# Altium PCB Leningrad_modify.PcbDoc (part 2 of 4)
Units mil, origin at the board's own origin, x right, y up, seen from the top; angles counter-clockwise.
Board outline 10000 x 7310 mil, 2 copper layers (Top Layer, Bottom Layer); 250 components, 267 nets, 1381 pads, 472 vias.
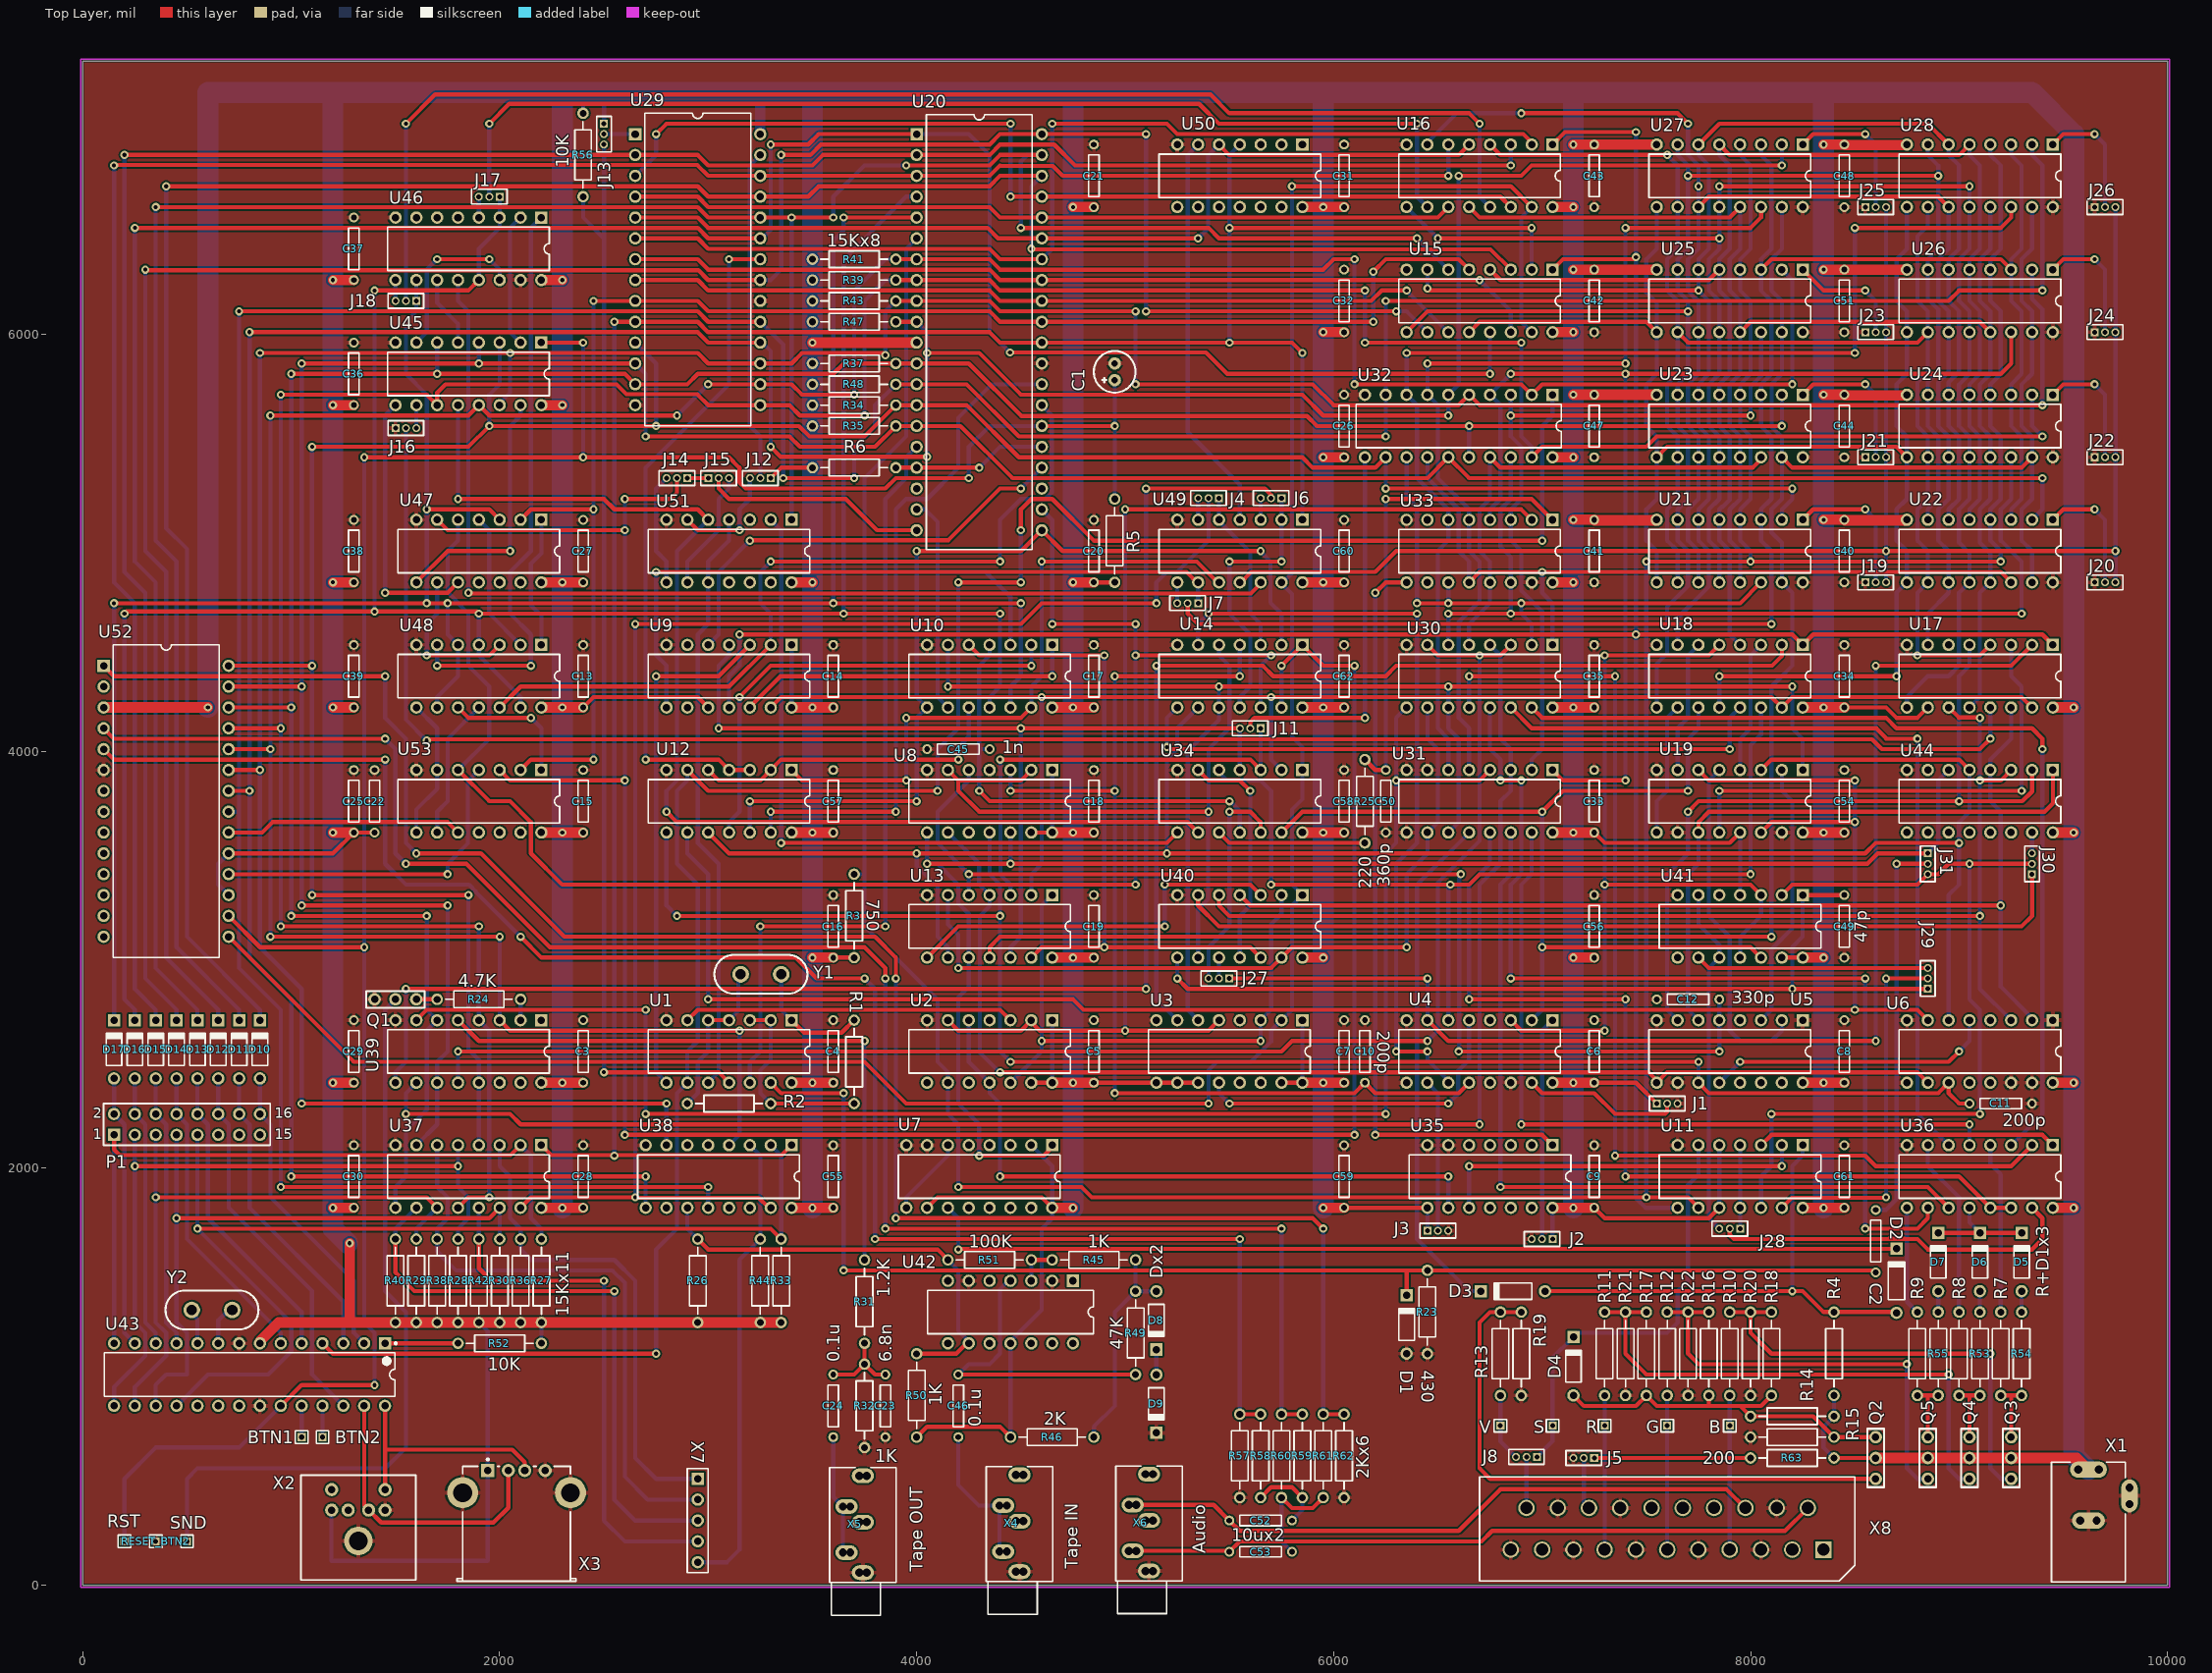
[diagram p0: Top Layer view]

## Via types
v1: diameter 39.37, hole 19.68, Top Layer to Bottom Layer, tented both sides, 472 vias

## Nets (pads, with @x,y where several pads share a name; then routed paths per layer and width w, separated by ;. In a path a pad name is that pad's centre, name@x,y a point inside that pad or via, vN(x,y) a via of type N, cw(c..) or ccw(c..) an arc to the next point about the centre after c; other vN are vias at no path point) (continued)
A10: (continued)
  Bottom Layer w20: v1(300,6310) 300,4960 400,4860 400,3010 650,2760 D12.2@650,2709.76 ; U29.21@3250,6260 3300,6260 3350,6310 v1(3350,6860) ; v1(5100,6110) v1(5100,6960) ; v1(6300,6110) 6350,6110 U15.10@6450,6010
A11: D13.2 U15.13 U20.1 U29.23 | length 12066.8
  Top Layer w20: v1(250,6510) 2950,6510 3000,6460 U29.23@3250,6460 ; v1(3300,6910) 3480,6910 3530,6960 U20.1@4000,6960 ; v1(4447.53,5912.47) 5387.53,5912.47 5490,5810 v1(6750,5810)
  Bottom Layer w20: v1(250,6510) 250,4910 350,4810 350,2960 550,2760 D13.2@550,2709.76 ; U29.23@3250,6460 3260,6460 3300,6500 v1(3300,6910) ; U20.1@4000,6960 4250,6960 4350,6860 4350,6010 v1(4447.53,5912.47) ; v1(6750,5810) U15.13@6750,6010
A12: D14.2 U16.3 U20.2 U29.2 | length 11107.3
  Top Layer w20: v1(200,6860) U29.2@2650,6860 2950,6860 3000,6810 3500,6810 3550,6860 U20.2@4000,6860 4350,6860 4400,6910 4660,6910 4760,6810 v1(6850,6810)
  Bottom Layer w20: v1(200,6860) 200,4860 300,4760 300,2910 450,2760 D14.2@450,2709.76 ; v1(6850,6810) U16.3@6850,6910
A13: D15.2 U16.6 U20.3 U29.26 | length 10797.3
  Top Layer w20: v1(150,6810) 152.47,6812.47 2947.53,6812.47 3000,6760 U29.26@3250,6760 U20.3@4000,6760 4350,6760 4400,6810 4402.47,6807.53 4652.47,6807.53 4700,6760 v1(6550,6760)
  Bottom Layer w20: v1(150,6810) 150,4810 250,4710 250,2860 350,2760 D15.2@350,2709.76 ; v1(6550,6760) U16.6@6550,6910
A14: D16.2 J17.1 U10.11 U20.4 U46.3 U46.13 U48.4 U48.13 | length 11859.2
  Top Layer w20: v1(200,4660) 210,4670 v1(1400,4670) 1890,4670 v1(1900,4660) v1(3650,4660) v1(4400,4660) ; v1(1400,6210) 1850,6210 U46.13@1900,6260
  Bottom Layer w20: v1(200,4660) 200,2810 250,2760 D16.2@250,2709.76 ; v1(1400,4670) v1(1400,6210) ; v1(1900,4660) U48.4@1900,4510 1900,4460 2100,4260 U48.13@2100,4210 ; U46.13@1900,6260 1900,6410 2000,6510 U46.3@2000,6560 J17.1@2000,6660 ; v1(3650,4660) 3650,6360 3950,6660 U20.4@4000,6660 ; U10.11@4350,4210 4350,4260 4400,4310 v1(4400,4660)
A15: D17.2 J18.1 U10.12 U20.5 U46.10 U47.3 U48.5 U48.9 | length 11616.6
  Top Layer w20: v1(150,4710) 1630,4710 ; v1(1650,4710) v1(1750,4710) v1(3600,4710) v1(4500,4710) ; v1(1650,5160) 1950,5160 U47.3@2000,5110 ; v1(3650,6560) U20.5@4000,6560
  Bottom Layer w20: D17.2@150,2709.76 v1(150,4710) ; U46.10@1600,6260 J18.1@1600,6160 1600,6110 1550,6060 1550,5810 1650,5710 v1(1650,5160) v1(1650,4710) ; U48.9@1700,4210 1700,4260 1800,4360 U48.5@1800,4510 1750,4560 v1(1750,4710) ; v1(3600,4710) 3600,6450 3650,6500 v1(3650,6560) ; U10.12@4450,4210 4450,4310 4500,4360 v1(4500,4710)
B\K\: U5.9 U6.10 U8.9 U13.4 | length 5812.8
  Top Layer w20: v1(4400,2460) 7510,2460 7550,2420 U5.9@7550,2410 7600,2460 8800,2460 U6.10@8850,2410
  Bottom Layer w20: U8.9@4150,3610 4300,3460 4300,3360 U13.4@4350,3310 4350,3257.53 4302.47,3210 4302.47,2554.23 4396.71,2460 v1(4400,2460)
B\L\A\N\K\: C49.2 J29.1 U40.8 U41.1 | length 4391.4
  Top Layer w20: v1(5250,2910) 5300,2860 v1(8200,2860) J29.1@8850,2860 ; U41.1@8250,3310 C49.2@8450,3310
  Bottom Layer w20: v1(5250,2910) U40.8@5250,3010 ; v1(8200,2860) 8200,3060 8250,3110 U41.1@8250,3310
B\O\R\D\E\R\: U13.6 U30.10 U31.10 U40.13 | length 3795
  Top Layer w20: v1(4200,2960) 5700,2960 U40.13@5750,3010 5800,3060 v1(6350,3060)
  Bottom Layer w20: U13.6@4150,3310 4150,3170 4200,3120 v1(4200,2960) ; v1(6350,3060) 6350,3410 6450,3510 U31.10@6450,3610 6500,3660 6500,4010 6450,4060 U30.10@6450,4210
BK: J31.1 U7.1 U8.8 U8.12 U13.10 U44.6 | length 7508.8
  Top Layer w20: v1(4050,3460) v1(4450,3460) 8560,3460 8610,3510 J31.1@8850,3510 ; v1(4300,2060) 4610,2060 4650,2100 U7.1@4650,2110
  Bottom Layer w20: U8.8@4050,3610 v1(4050,3460) 4100,3460 4200,3360 4200,3270 4250,3220 U13.10@4250,3010 4250,2870 4200,2820 4200,2310 4300,2210 v1(4300,2060) ; v1(4450,3460) U8.12@4450,3610 ; J31.1@8850,3520 8860,3520 8900,3560 8900,3860 U44.6@8950,3910
BRD0: U30.3 U30.7 U39.12 | length 7215.7
  Top Layer w20: v1(1800,2560) 5750,2560 5800,2610 v1(6450,2610) ; U30.7@6450,4510 6500,4460 v1(6700,4460) 6800,4460 U30.3@6850,4510
  Bottom Layer w20: U39.12@1800,2410 v1(1800,2560) ; v1(6450,2610) 6500,2660 6500,3370 6700,3570 v1(6700,4460)
BRD1: U30.4 U31.3 U39.10 | length 7745
  Top Layer w20: v1(1550,2260) 2050,2260 2100,2210 v1(6700,2210)
  Bottom Layer w20: v1(1550,2260) 1550,2360 U39.10@1600,2410 ; v1(6700,2210) 6700,3360 6800,3460 6800,3760 6850,3810 U31.3@6850,3910 6850,4010 6800,4060 6800,4460 U30.4@6750,4510
BRD2: U30.9 U31.4 U39.7 | length 7632.8
  Top Layer w20: U39.7@1600,2710 1650,2760 v1(2700,2760) ; v1(2700,2260) v1(6250,2260) ; v1(6300,3860) 6700,3860 U31.4@6750,3910
  Bottom Layer w20: v1(2700,2260) v1(2700,2760) ; v1(6250,2260) 6250,3510 6300,3560 v1(6300,3860) 6300,4160 U30.9@6350,4210